# Altium PCB Medusa_9x8.PcbDoc
Units mil, origin at the board's own origin, x right, y up, seen from the top; angles counter-clockwise.
Board outline 3550 x 3000 mil, 4 copper layers (Top Layer, Layer 1, Layer 2, Bottom Layer), stack 23.756 mil thick; 74 components, 67 nets, 329 pads, 111 vias.
Unrouted connection lines stored in the file: 3.
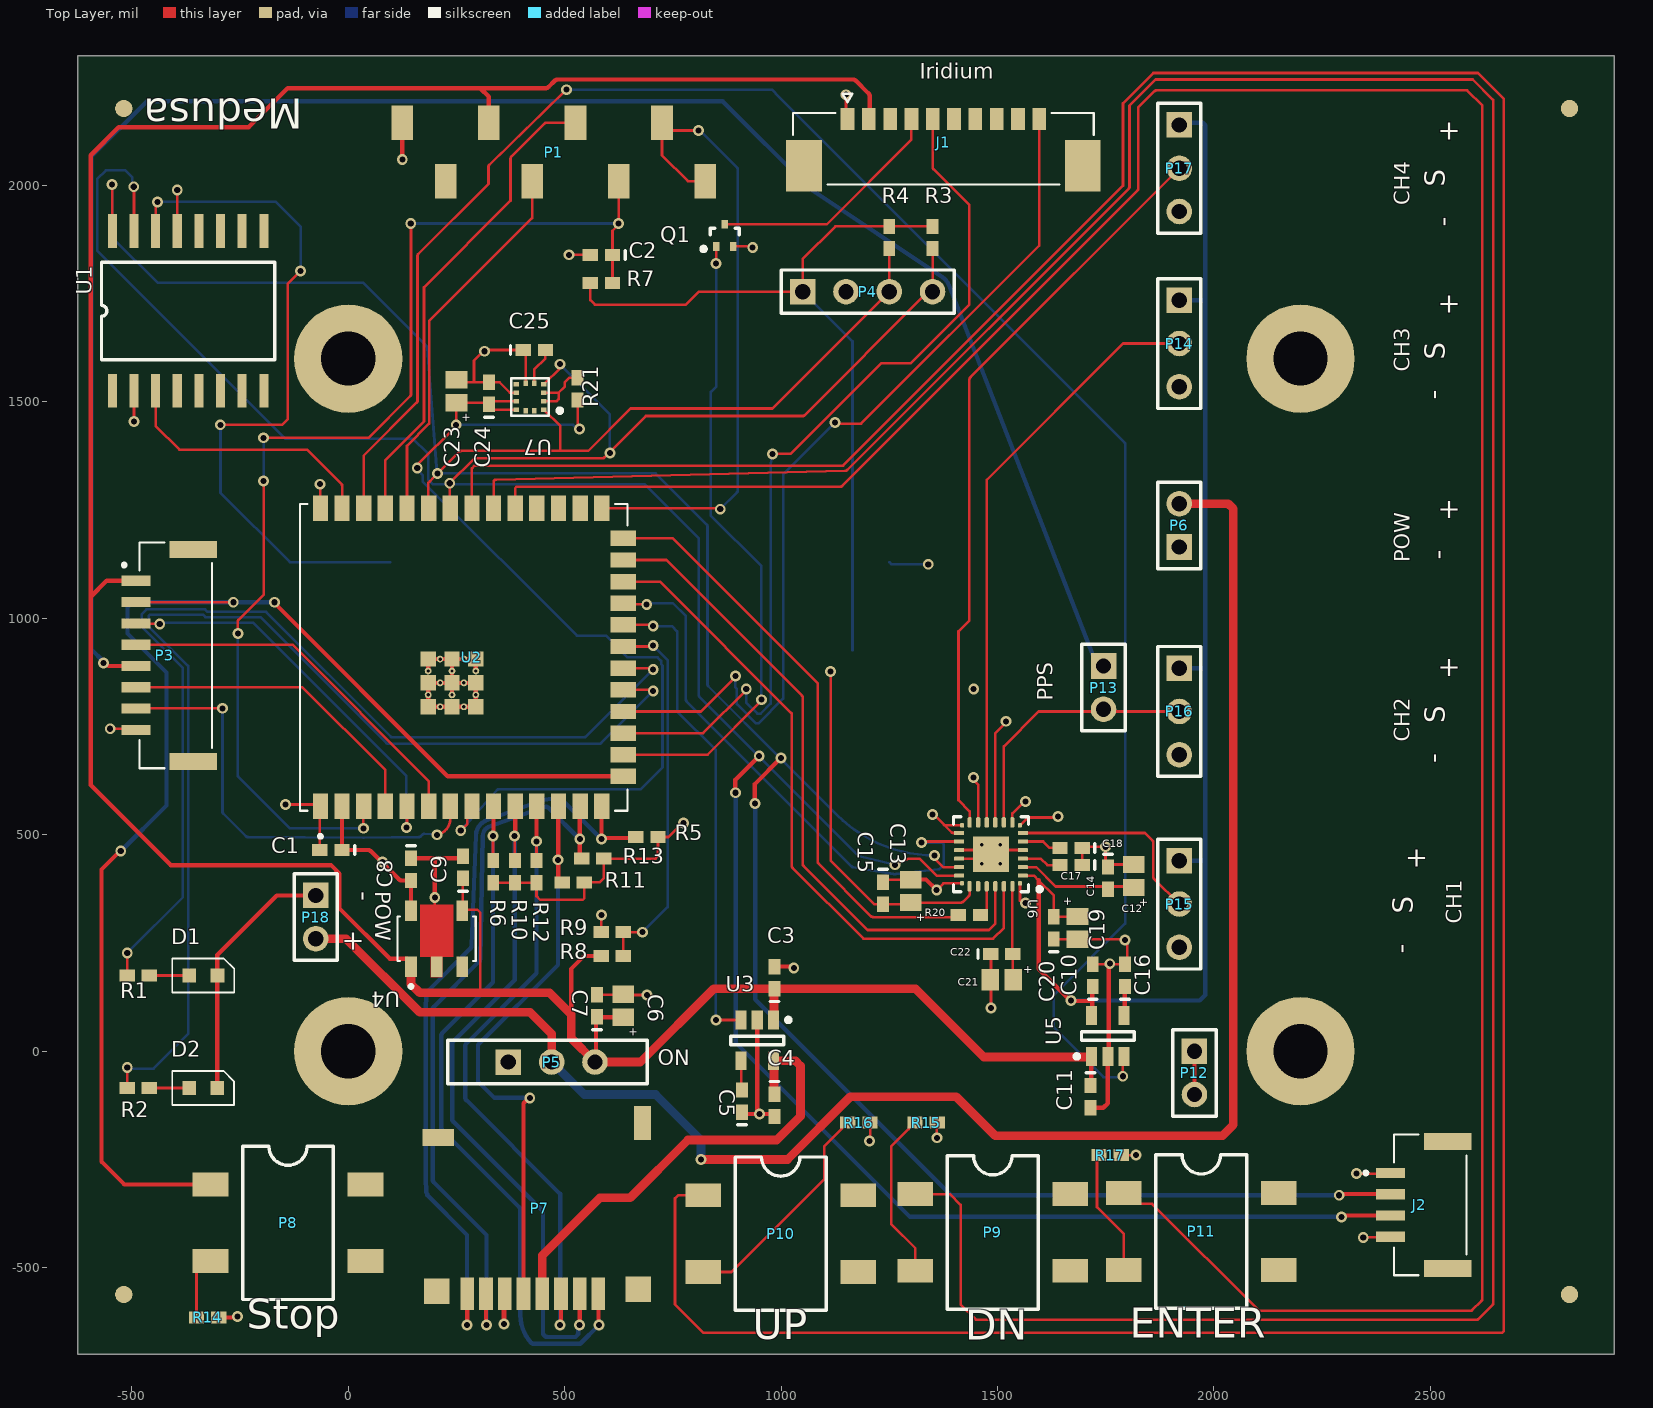
[diagram p0: Top Layer view]
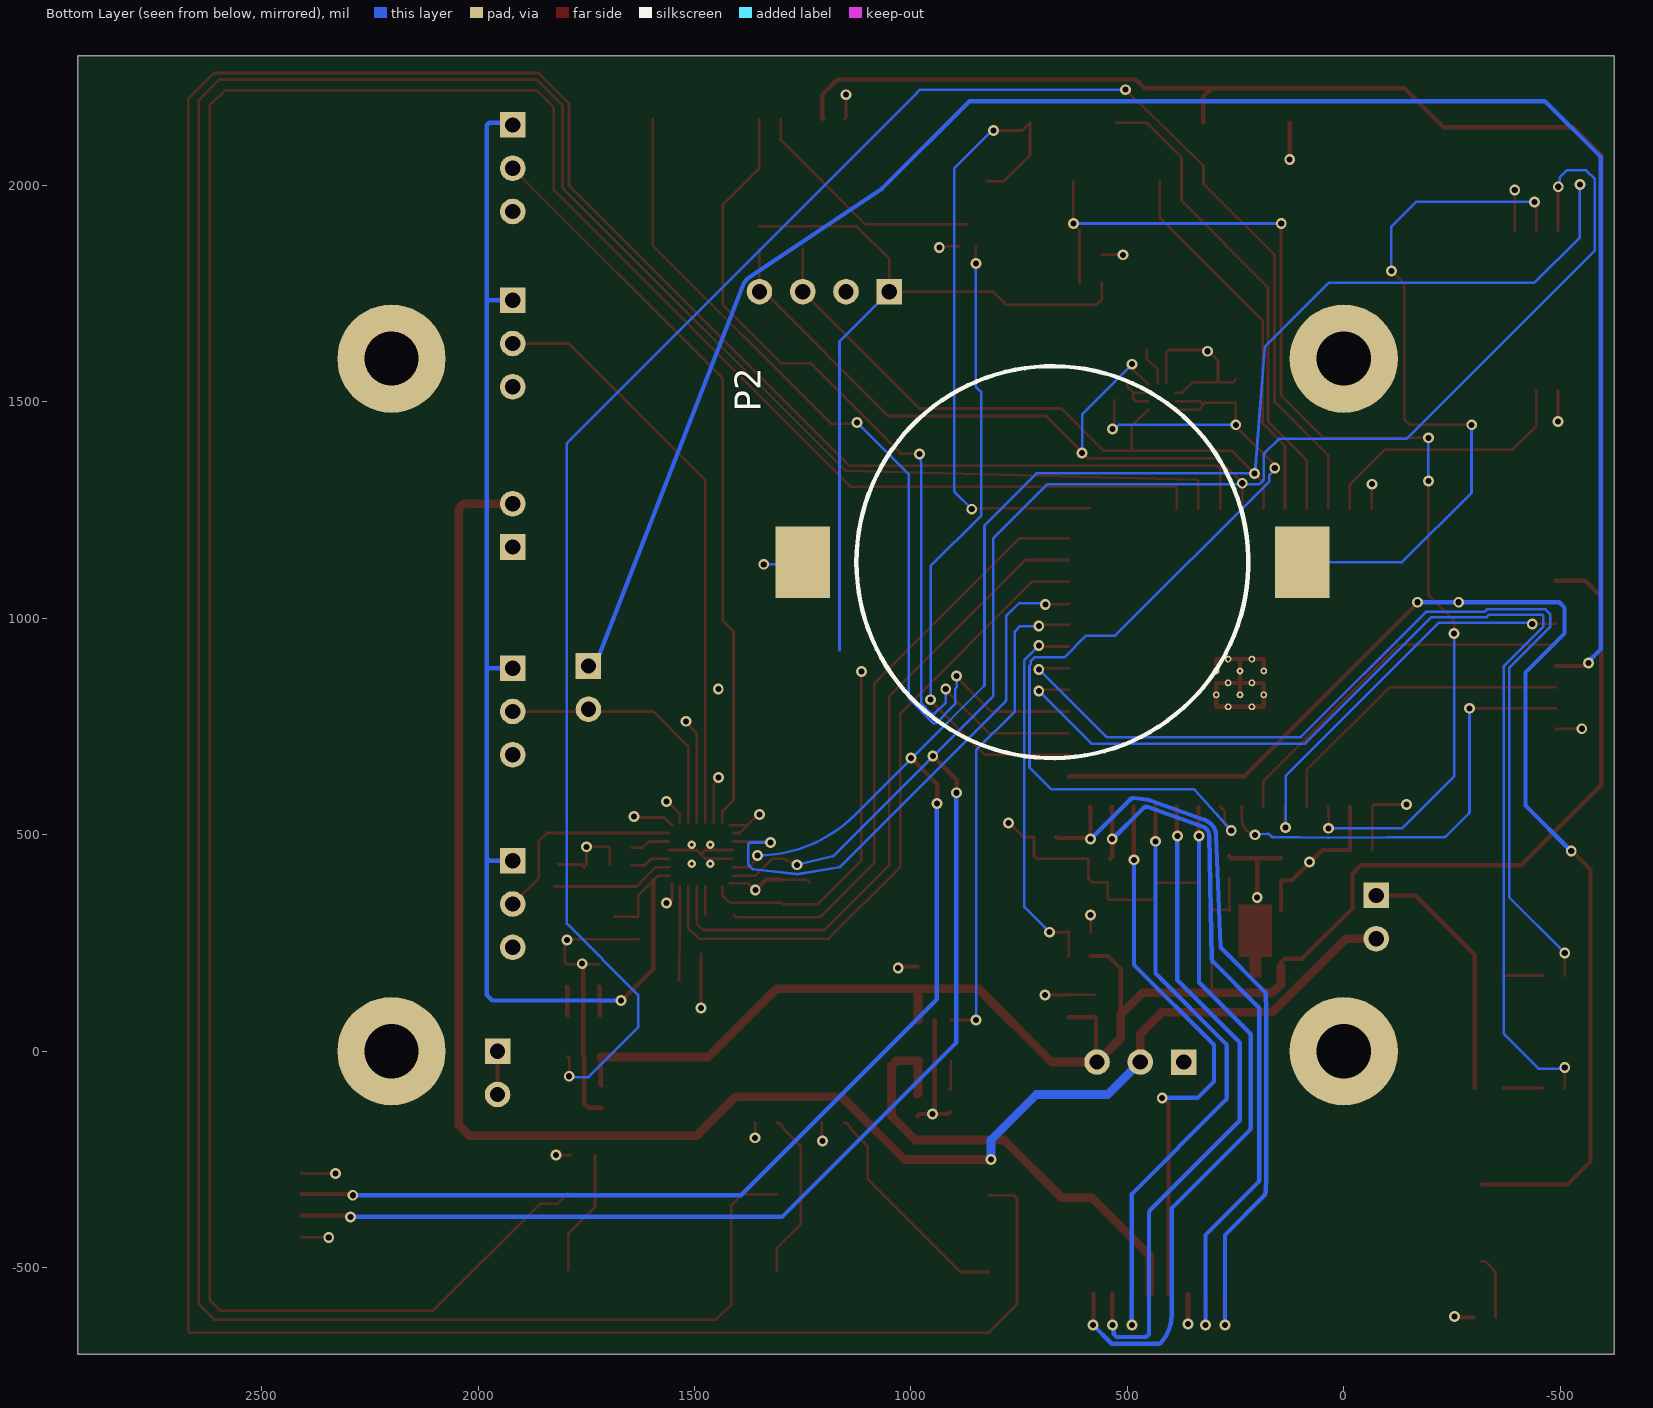
[diagram p1: Bottom Layer view, seen from below]
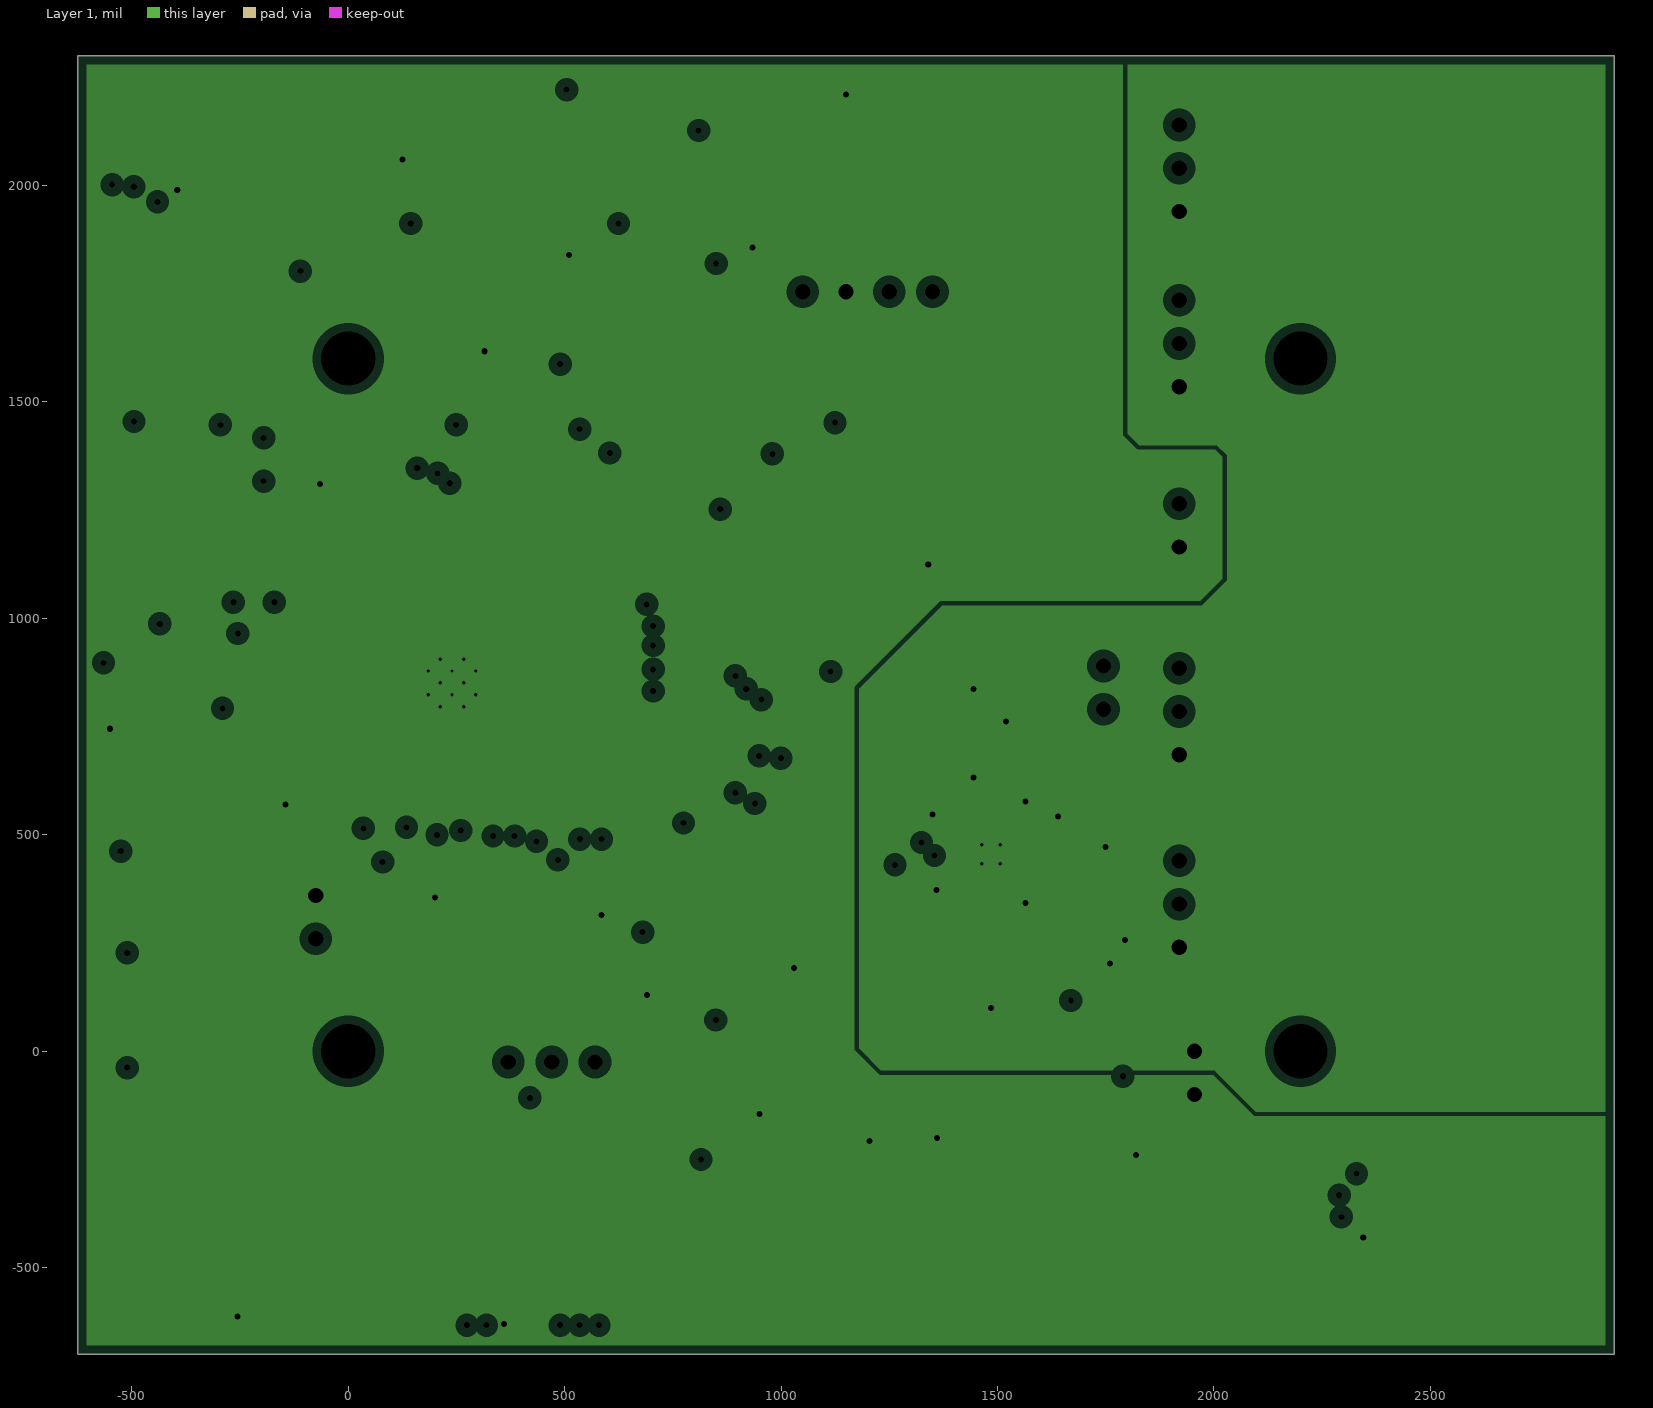
[diagram p2: Layer 1, clearances drawn from the general rule]
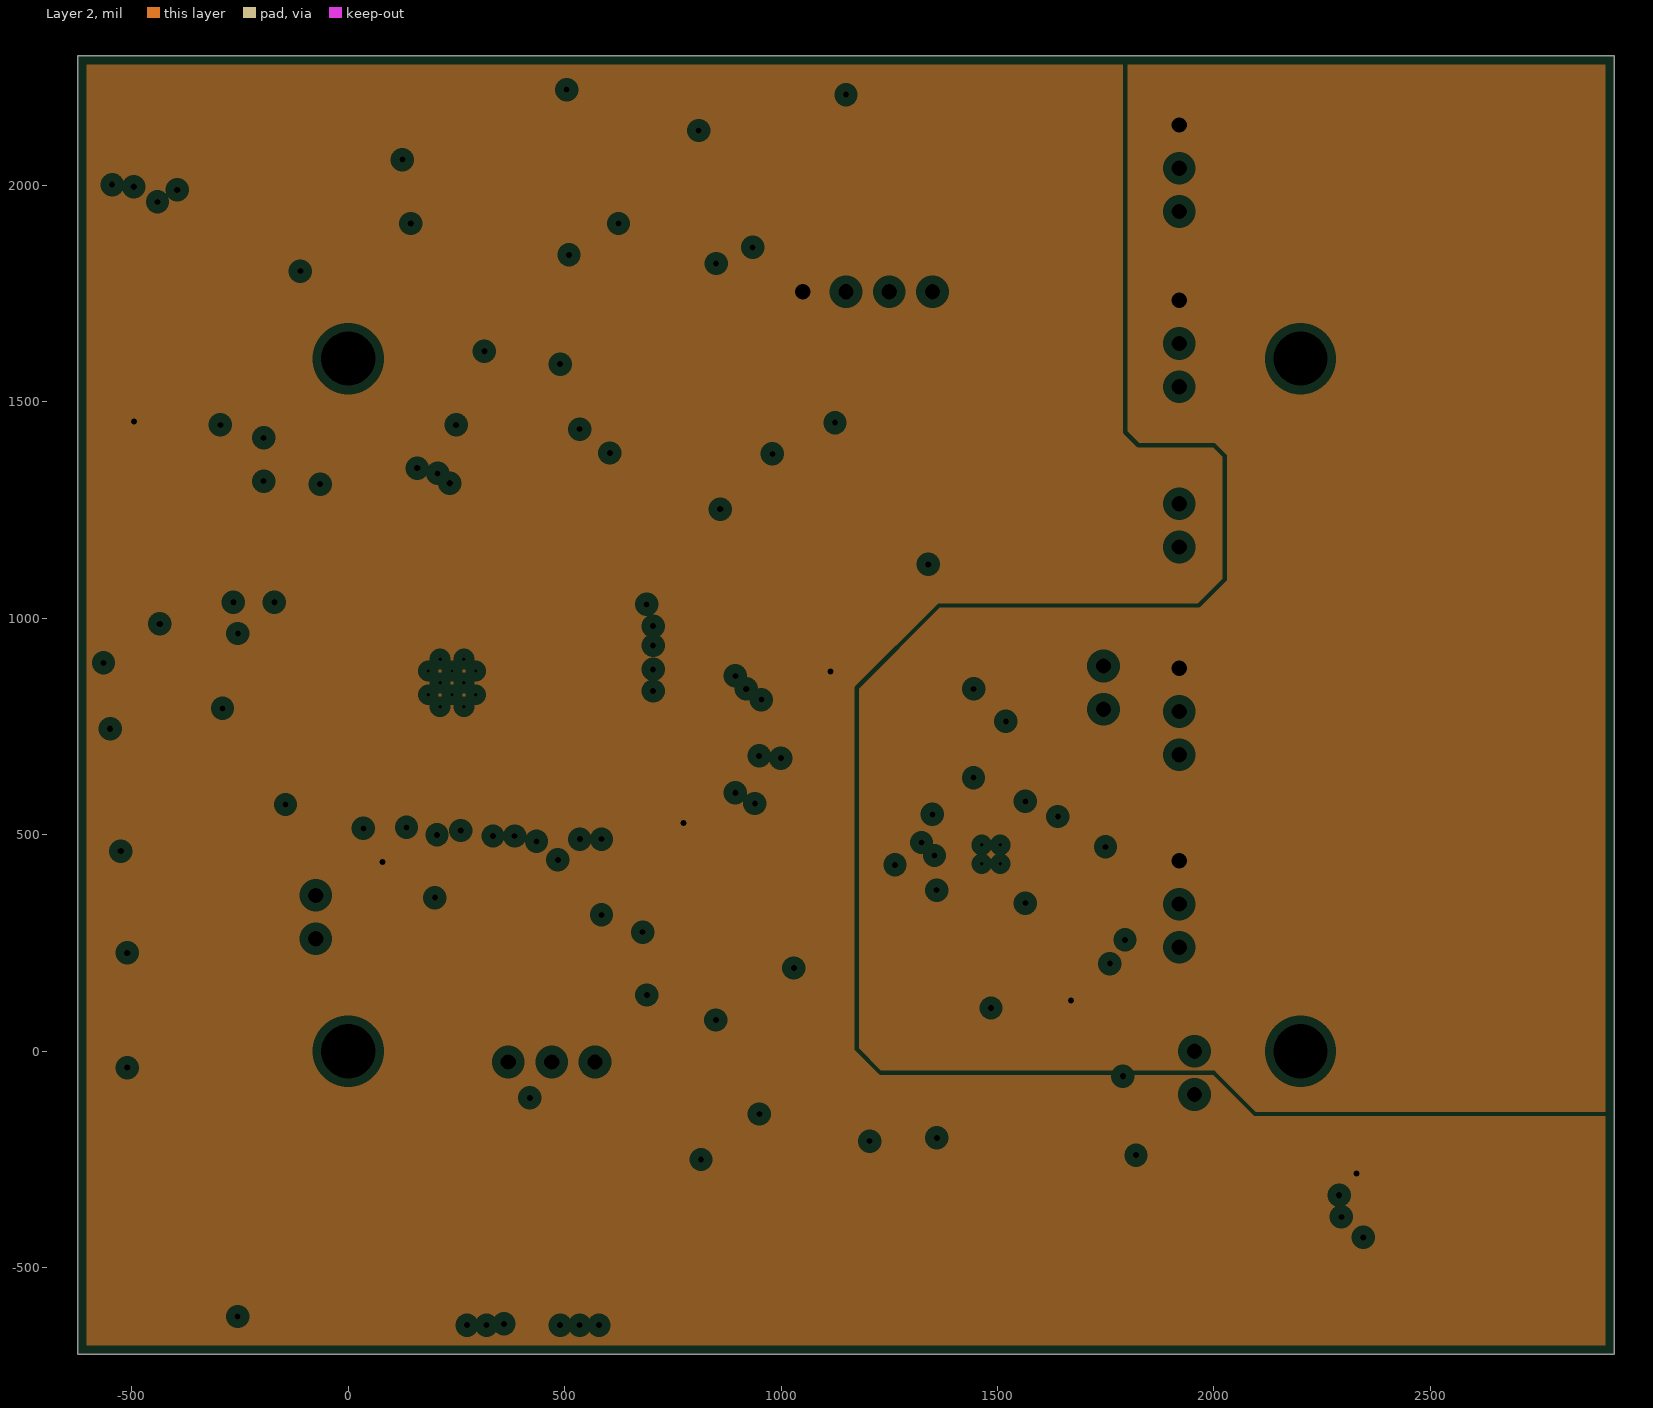
[diagram p3: Layer 2, clearances drawn from the general rule]

## Layer stack, top to bottom
Top Solder: solder mask 0.4, Solder Resist, Dk 3.5
Top Layer: signal copper 1.4
Dielectric 2: prepreg 2.8, PP-006, Dk 4.1
Layer 1: plane copper 1.378, net (Multiple Nets)
Dielectric 1: dielectric 12.6, FR-4, Dk 4.8
Layer 2: plane copper 1.378, net (Multiple Nets)
Dielectric 3: prepreg 2.8, PP-006, Dk 4.1
Bottom Layer: signal copper 1.4
Bottom Solder: solder mask 0.4, Solder Resist, Dk 3.5

## Board outline
-625,-700 2925,-700 2925,2300 -625,2300

## Design rules (kind name [scope] priority, off if disabled: settings)
Clearance [All] p1: gap=6 ignorepadtopadclearanceinfootprint=FALSE
PlaneClearance [All] p1: clearance=20
PlaneConnect [All] p1: planeconnectstyle=Relief reliefexpansion=20 reliefentries=4 reliefconductorwidth=10 reliefairgap=10
PolygonConnect [All] p1: connectstyle=Relief reliefconductorwidth=10 reliefentries=4 polygonreliefangle="90 Angle" airgapwidth=10
RoutingVias [All] p1: holewidth=28 width=50 viastyle="Through Hole" minholewidth=28 minwidth=50 maxholewidth=28 maxwidth=50
SolderMaskExpansion [All] p1: expansion=4 istentingtop=FALSE
Width [All] p1: maxlimit=20 minlimit=6 preferedwidth=10
28 further rules are at their usual default settings.

## Classes and differential pairs
component class Medusa_9x8: C1 C2 C3 C4 C5 C6 C7 C8 C9 D1 D2 J1 P1 P2 P3 P4 P5 P6 P7 P8 P9 P10 P11 P18 Q1 R1 R2 R3 R4 R5 R6 R7 R8 R9 R10 R11 R12 R13 R14 R15 R16 R17 U1 U2 U3 U4
component class Medusa_9x8_audio: C10 C11 C12 C13 C14 C15 C16 C17 C18 C19 C20 C21 C22 C23 C24 C25 J2 P12 P13 P14 P15 P16 P17 R20 R21 U5 U6 U7

## Components (designator, comment, footprint, x,y, rotation, side; value= is the part's Value field where it differs from the comment)
C1 "0.1uF" 0402 -40,465 r180 top
C2 "1uF" 0402 585,1840 r180 top value=0.1uF
C3 "1.0uF" 0402 985,170 r90 top value=0.1uF
C4 "2.2uF" 0402 985,-125 r270 top value=0.1uF
C5 "10nF" 0402 910,-115 r90 top value=0.1uF
C6 "10uF" Tant0805 635,105 r270 top
C7 "0.1uF" 0402 575,105 r90 top
C8 "4.7uF" 0402 145,420 r270 top value=0.1uF
C9 "4.7uF" 0402 265,425 r90 top value=0.1uF
C10 "2.2uF" 0402 1720,175.16 r90 top value=0.1uF
C11 "1uF" 0402 1715,-104.84 r270 top value=0.1uF
C12 "10uF" Tant0805 1815,405 r270 top
C13 "10uF" Tant0805 1300,370 r270 top
C14 "0.1uF" 0402 1755,400 r270 top
C15 "0.1uF" 0402 1235,365 r270 top
C16 "10nF" 0402 1795,175.16 r90 top value=0.1uF
C17 "1.0uF" 0402 1670,430 r180 top value=0.1uF
C18 "1.0uF" 0402 1670,470 r180 top value=0.1uF
C19 "1uF" Tant0805 1685,285 r90 top value=10uF
C20 "0.1uF" 0402 1630,285 r90 top
C21 "10uF" Tant0805 1510,165 r0 top
C22 "0.1uF" 0402 1510,225 r0 top
C23 "10uF" Tant0805 250,1525 r270 top
C24 "0.1uF" 0402 325,1520 r90 top
C25 "220nF" 0402 430,1620 r0 top value=0.1uF
D1 "LED_0603_GREEN" Diode0603 -334.5,175 r0 top
D2 "LED_0603_RED" Diode0603 -335,-85 r0 top
J1 "533981071" MOLEX_533981071 1375,2085 r180 top
J2 "BM04B-GHS-TBT(LF)(SN)(N)" JST_BM04B-GHS-TBT(LF)(SN)(N) 2540,-355 r90 top
P1 "10129380-908001BLF" Header_8_SMT 125,2145 r0 top
P2 "CoinCellHolder" CoinCellHolder 96.46,1130 r0 bottom
P3 "BM08B-GHS-TBT(LF)(SN)(N)" JST_BM08B-GHS-TBT(LF)(SN)(N) -490,914.61 r90 top
P4 "Display" HDR1X4 1050,1755 r0 top
P5 "switch" HDR1X3 370,-25 r0 top
P6 "Header 2" HDR1X2 1920,1165 r90 top
P7 "microSD Hirose" "DM3D microSD" 515,-435 r90 top
P8 "factory reset" SOP4 -318.27,-307.83 r0 top
P9 "factory reset" SOP4 1310,-330 r0 top
P10 "factory reset" SOP4 820,-332.83 r0 top
P11 "factory reset" SOP4 1791.73,-327.83 r0 top
P12 "GND Tie" HDR1X2 1955,0 r270 top
P13 "Jumper PPS to Audio R" HDR1X2 1745,890 r270 top
P14 "HYDROPHONE" HDR1X3 1920,1735 r270 top
P15 "HYDROPHONE" HDR1X3 1920,440 r270 top
P16 "HYDROPHONE" HDR1X3 1920,885 r270 top
P17 "HYDROPHONE" HDR1X3 1920,2140 r270 top
P18 "Header 2" HDR1X2 -75,360 r270 top
Q1 "DMN5L06TK-7" SOT-523 870,1885 r90 top
R1 "330Ohm" 2-0402 -485,175 r180 top
R2 "330Ohm" 2-0402 -485,-85 r180 top
R3 "4.7k" 2-0402 1350,1880 r270 top
R4 "4.7k" 2-0402 1250,1880 r270 top
R5 "10K" 2-0402 690,495 r0 top
R6 "10K" 2-0402 335,415 r270 top
R7 "10K" 2-0402 585,1775 r0 top
R8 "100k" 2-0402 610,220 r180 top
R9 "100k" 2-0402 610,275 r0 top
R10 "10K" 2-0402 385,415 r270 top
R11 "10K" 2-0402 520,390 r0 top
R12 "10K" 2-0402 435,415 r270 top
R13 "10K" 2-0402 565,445 r0 top
R14 "10k" 2-0402 -325,-615 r0 top
R15 "10k" 2-0402 1335,-165 r0 top
R16 "10k" 2-0402 1180,-165 r0 top
R17 "10k" 2-0402 1760,-240 r0 top
R20 "51Ohm" 2-0402 1435,315 r0 top
R21 "10k" 2-0402 530,1530 r270 top
U1 "DS3231" DS3231 -545,1526.1 r90 top
U2 "ESP32-S3-WROOM-1U-N16R8" XCVR_ESP32-S3-WROOM-1U-N16R8 266.89,910 r90 top
U3 "ADP1712" MF05A_N 945,25 r270 top
U4 "3.3V LDO" AP7361C-33Y5-13 145,195.08 r90 top
U5 "ADP1712" MF05A_N 1755,35.16 r90 top
U6 "PCM3140-Q1" PCM3140 1485,455 r180 top
U7 "Accel/Mag" LGA-12 451.34,1481.97 r180 top

## Footprints (in the part's own frame and the unit in brackets; to place one, negate y for a bottom-side part, rotate by r counter-clockwise, add the part's x,y. Pads: shape width x height; smd on the part's side, far side on the other; paste and mask are expansions set on the pad)
2-0402 [mm] "Chip Resistor; Body 1 x 0.5 mm (LxW typ)"
  rect 0.9x0.7 smd: 1(-0.65,0) 2(0.65,0)
0402 [mm] "Chip Capacitor; Body 1.0 x 0.5 mm (LxW typ)"
  rect 0.9x0.7 smd: 1(-0.65,0) 2(0.65,0)
  silkscreen extent -1.4,-0.25 -1.4,0.25
AP7361C-33Y5-13 [mm] "3.3V LDO"
  rect 1.2x0.68 smd: 1(0,0) 3(0,-3) 4(3.3,-3) 5(3.3,0)
  rect 1.2x0.68 smd paste-2 mask+0: 2(0,-1.5)
  Top Layer region: 3.65,-2.465 0.6,-2.465 0.6,-1.84 -0.6,-1.84 -0.6,-1.16 0.6,-1.16 0.6,-0.535 3.65,-0.535
  silkscreen extent -1.25,-3.8 2.95,0.8
CoinCellHolder [mm] "MPD BU2032SM-BT-GTR"
  rect 3.2x4.2 smd: 1(0,0) 2(29.3,0)
  silkscreen extent 3.15,-11.5 26.15,11.5
Diode0603 [mm]
  rect 0.8x0.8 smd: A(-0.825,0) K(0.825,0)
  silkscreen extent -1.83,-1 1.8,1
"DM3D microSD" [mm] "MICROSD_HIROSE Push-Pull"
  rect 1.5x1.5 smd: 0(-3.048,7.874) 0(-2.921,-3.937)
  rect 1x1.85 smd: 0(6,7.8)
  rect 2x1 smd: 0(6.85,-4.191)
  rect 1.9x0.8 smd: 1(-3.188,-1.601) 2(-3.188,-0.501) 3(-3.188,0.599) 4(-3.188,1.699) 5(-3.188,2.799) 6(-3.188,3.899) 7(-3.188,4.999) 8(-3.188,6.099)
  body extent -3.65,-4.45 7.8,7.5, height 1.55
DS3231 [mm]
  rect 1.98x0.53 smd: 1(0,0) 2(0,-1.27) 3(0,-2.54) 4(0,-3.81) 5(0,-5.08) 6(0,-6.35) 7(0,-7.62) 8(0,-8.89) 9(9.37,-8.89) 10(9.37,-7.62) 11(9.37,-6.35) 12(9.37,-5.08) 13(9.37,-3.81) 14(9.37,-2.54) 15(9.37,-1.27) 16(9.37,0)
  silkscreen extent 1.83,-9.53 7.54,0.64
HDR1X2 [mm] "Connector; Header; 2 Position"
  rect 1.5x1.5 hole 0.9: 1(0,0)
  round 1.5 hole 0.9: 2(2.54,0)
  silkscreen extent -1.27,-1.27 3.81,1.27
HDR1X3 [mm] "Connector; Header; 3 Position"
  rect 1.5x1.5 hole 0.9: 1(0,0)
  round 1.5 hole 0.9: 2(2.54,0) 3(5.08,0)
  silkscreen extent -3.56,-1.27 8.14,1.27
HDR1X4 [mm] "Connector; Header; 4 Position"
  rect 1.5x1.5 hole 0.9: 1(0,0)
  round 1.5 hole 0.9: 2(2.54,0) 3(5.08,0) 4(7.62,0)
  silkscreen extent -1.27,-1.27 8.89,1.27
Header_8_SMT [mil] "Amphenol  10129380-908001BLF"
  rect 50x80 smd: 1(0,0) 2(100,-135) 3(200,0) 4(300,-135) 5(400,0) 6(500,-135) 7(600,0) 8(700,-135)
JST_BM04B-GHS-TBT(LF)(SN)(N) [mm]
  rect 0.6x1.7 smd: 1(1.875,3.35) 2(0.625,3.35) 3(-0.625,3.35) 4(-1.875,3.35)
  rect 1x2.8 smd: S1(-3.725,0) S2(3.725,0)
  silkscreen extent -4.13,-1.1 4.13,4.9
JST_BM08B-GHS-TBT(LF)(SN)(N) [mm]
  rect 0.6x1.7 smd: 1(4.375,0) 2(3.125,0) 3(1.875,0) 4(0.625,0) 5(-0.625,0) 6(-1.875,0) 7(-3.125,0) 8(-4.375,0)
  rect 1x2.8 smd: P1(-6.225,-3.35) P2(6.225,-3.35)
  silkscreen extent -6.63,-4.45 6.63,0.8
LGA-12 [mm] "LIS2DS12"
  rect 0.325x0.275 smd paste-0.02 mask+0.01: 1(0,0) 2(0,-0.5) 3(0,-1) 4(0,-1.5) 7(1.6,-1.5) 8(1.6,-1) 9(1.6,-0.5) 10(1.6,0)
  rect 0.275x0.325 smd paste-0.02 mask+0.01: 5(0.55,-1.55) 6(1.05,-1.55) 11(1.05,0.05) 12(0.55,0.05)
  silkscreen extent -1.05,-1.85 1.9,0.35
MF05A_N [mm] "SOT23, 5-Leads, Body 2.9x1.6mm, Pitch 0.95mm, Lead Span 2.8mm, IPC Medium Density"
  rect 1.1x0.65 smd: 1(-1.2,0.95) 2(-1.2,0) 3(-1.2,-0.95) 4(1.2,-0.95) 5(1.2,0.95)
  silkscreen extent -1.32,-1.55 0.25,1.95, body extent -0.9,-1.55 0.9,1.55, height 1.19
MOLEX_533981071 [mm]
  rect 0.8x1.3 smd mask+0.076: 1(5.625,-1.75) 2(4.375,-1.75) 3(3.125,-1.75) 4(1.875,-1.75) 5(0.625,-1.75) 6(-0.625,-1.75) 7(-1.875,-1.75) 8(-3.125,-1.75) 9(-4.375,-1.75) 10(-5.625,-1.75)
  rect 2.1x3 smd mask+0.076: S1(-8.175,1) S2(8.175,1)
  silkscreen extent -8.82,-3.23 8.82,2.1
PCM3140 [mm] "QFN, 24-Leads, Body 4.00x4.00mm, Pitch 0.50mm, Thermal Pad 2.10x2.10mm, IPC Medium Density"
  rrect50% 0.6x0.24 smd mask+0.07: 1(-1.875,1.25) 2(-1.875,0.75) 3(-1.875,0.25) 4(-1.875,-0.25) 5(-1.875,-0.75) 6(-1.875,-1.25) 13(1.875,-1.25) 14(1.875,-0.75) 15(1.875,-0.25) 16(1.875,0.25) 17(1.875,0.75) 18(1.875,1.25)
  rrect50% 0.24x0.6 smd mask+0.07: 7(-1.25,-1.875) 8(-0.75,-1.875) 9(-0.25,-1.875) 10(0.25,-1.875) 11(0.75,-1.875) 12(1.25,-1.875) 19(1.25,1.875) 20(0.75,1.875) 21(0.25,1.875) 22(-0.25,1.875) 23(-0.75,1.875) 24(-1.25,1.875)
  rect 2.1x2.1 smd paste-0.15: 25(0,0)
  rrect50% 0.25x0.25 smd mask+0.07: A1(-1.7,1.7) A2(-1.7,-1.7) A3(1.7,-1.7) A4(1.7,1.7)
  silkscreen extent -2.98,-2.2 2.2,2.2, body extent -2.05,-2.05 2.05,2.05, height 1
SOP4 [mm]
  rect 2.1x1.4 smd: 1(0,0) 2(0,-4.5) 3(9.1,-4.5) 4(9.1,0)
  silkscreen extent 1.89,-6.75 7.21,2.25
SOT-523 [mm] "For Diodes Inc MOSFET DMN5L06TK"
  rect 0.51x0.4 smd: 1(-0.65,0.5) 2(-0.65,-0.5) 3(0.65,0)
  silkscreen extent -0.92,-0.85 0.42,1.37, body extent -0.43,-0.85 0.42,0.85, height 0.8
Tant0805 [mil]
  rect 40x50 smd: 1(-26.5,0) 2(26.5,0)
XCVR_ESP32-S3-WROOM-1U-N16R8 [mm]
  rect 1.5x0.9 smd: 1(-8.75,8.41) 2(-8.75,7.14) 3(-8.75,5.87) 4(-8.75,4.6) 5(-8.75,3.33) 6(-8.75,2.06) 7(-8.75,0.79) 8(-8.75,-0.48) 9(-8.75,-1.75) 10(-8.75,-3.02) 11(-8.75,-4.29) 12(-8.75,-5.56) 13(-8.75,-6.83) 14(-8.75,-8.1) 27(8.75,-8.1) 28(8.75,-6.83) 29(8.75,-5.56) 30(8.75,-4.29) 31(8.75,-3.02) 32(8.75,-1.75) 33(8.75,-0.48) 34(8.75,0.79) 35(8.75,2.06) 36(8.75,3.33) 37(8.75,4.6) 38(8.75,5.87) 39(8.75,7.14) 40(8.75,8.41)
  rect 0.9x1.5 smd: 15(-6.985,-9.35) 16(-5.715,-9.35) 17(-4.445,-9.35) 18(-3.175,-9.35) 19(-1.905,-9.35) 20(-0.635,-9.35) 21(0.635,-9.35) 22(1.905,-9.35) 23(3.175,-9.35) 24(4.445,-9.35) 25(5.715,-9.35) 26(6.985,-9.35)
  rect 0.9x0.9 smd: 41_1(-2.9,2.09) 41_2(-1.5,2.09) 41_3(-0.1,2.09) 41_4(-2.9,0.69) 41_5(-1.5,0.69) 41_6(-0.1,0.69) 41_7(-2.9,-0.71) 41_8(-1.5,-0.71) 41_9(-0.1,-0.71)
  round 0.4 hole 0.2 mask+0: 41_10(-2.2,2.09) 41_11(-0.8,2.09) 41_12(-2.9,1.39) 41_13(-1.5,1.39) 41_14(-0.1,1.39) 41_15(-2.2,0.69) 41_16(-0.8,0.69) 41_17(-2.9,-0.01) 41_18(-1.5,-0.01) 41_19(-0.1,-0.01) 41_20(-2.2,-0.71) 41_21(-0.8,-0.71)
  silkscreen extent -10.6,-9.6 9,9.6, body extent -9,-9.6 9,9.6, height 3.35

## Part data
C1 C2 C3 C4 C5 C7 C8 C9 C10 C11 C14 C15 C16 C17 C18 C20 C22 C24 C25: library part C0402, "Ceramic Chip Capacitor - Standard", PackageDocument=Mar-2001, Code_IPC="1005 [0402]", Code_JEITA=0402, ComponentLink1Description="Manufacturer Link", ComponentLink1URL=http://www.kemet.com/, ComponentLink2Description=Datasheet, ComponentLink2URL=http://www.kemet.com/kemet/web/homepage/kechome.nsf/vapubfilesname/F3102TA.pdf/$file/F3102TA.pdf, DatasheetDocument=Mar-2001, LatestRevisionDate=19-Mar-2004, LatestRevisionNote="Silkscreen size reduced.", Note="Footprint corresponds to dimensions for bulk cassette packaging. This case size has tightened tolerances.", PackageReference=0402, Published=17-Jul-2002, Publisher="Altium Limited"
C6 C12 C13 C19 C21 C23: library part Tant0805
D1 D2: library part LED_0603, Supplier Part Number 1=18AC7715, Supplier 1=Newark
J1: Package=None, Availability=Unavailable, MP=533981071, Price=None
J2: "Connector Header Surface Mount 4 position 0.049 _1.25mm_", Package=None, Digi-Key_Part_Number=455-1580-1-ND, Digi-Key_Purchase_URL=https://www.digikey.com/product-detail/en/jst-sales-america-inc/BM04B-GHS-TBT_LF__SN__N_/455-1580-1-ND/807848?utm_source=snapeda&utm_medium=aggregator&utm_campaign=symbol, MF="JST Sales", MP=BM04B-GHS-TBT_LF__SN__N_, SnapEDA_Link=https://www.snapeda.com/parts/BM04B-GHS-TBT%28LF%29%28SN%29%28N%29/JST%20Sales%20America%20Inc./view-part/841999/?ref=snap
P1: library part Header8_SMT, "Surface mount header", Supplier Part Number 1=649-1012938090801BLF, Supplier 1=Mouser
P2: Supplier Part Number 1=BU2032SM-BT-GCT-ND, Supplier 1=Digi-Key
P3: "Connector Header Surface Mount 8 position 0.049 _1.25mm_", Package=None, Availability=Unavailable, MF="JST Sales", MP=BM08B-GHS-TBT_LF__SN__N_, Price=None, SnapEDA_Link=https://www.snapeda.com/parts/BM08B-GHS-TBT%28LF%29%28SN%29%28N%29/JST%20Sales%20America%20Inc./view-part/568692/?ref=snap
P4: library part "Header 4", "Header, 4-Pin", LatestRevisionDate=17-Jul-2002, LatestRevisionNote="Re-released for DXP Platform.", Publisher="Altium Limited"
P5 P14 P15 P16 P17: library part "Header 3", "Header, 3-Pin", LatestRevisionDate=17-Jul-2002, LatestRevisionNote="Re-released for DXP Platform.", Publisher="Altium Limited"
P6 P18: "Header, 2-Pin", LatestRevisionDate=17-Jul-2002, LatestRevisionNote="Re-released for DXP Platform.", Publisher="Altium Limited"
P7: Supplier Part Number 1=HR1941DKR-ND, Supplier 1=Digi-Key
P8 P9 P10 P11: library part pushbutton, Supplier Part Number 1=450-1757-2-ND, Supplier 1=Digi-Key
P12 P13: library part "Header 2", "Header, 2-Pin", LatestRevisionDate=17-Jul-2002, LatestRevisionNote="Re-released for DXP Platform.", Publisher="Altium Limited"
Q1: library part "FET DMN5L06TK-7", "Ultra-low leakage Enhanced MOSFET", Supplier Part Number 1=DMN5L06TKDICT-ND, Creator and Date="Will Flanery 2010-09-02", Fabrication Tested=NO, HelpURL=http://www.diodes.com/datasheets/ds30926.pdf, Supplier 1=Digi-Key
R1 R2 R3 R4 R5 R6 R7 R8 R9 R10 R11 R12 R13 R14 R15 R16 R17 R20 R21: library part ERJ2RB, "Precision Thick Film Chip Resistor, 10 Ohm to 1M Ohm Range, 1% and 0.5% Tolerance, 0402 Size, 0.063 W", PackageDocument=Mar-2003, Code_IPC="1005 [0402]", ComponentLink1Description="Manufacturer Link", ComponentLink1URL=http://www.panasonic.com/industrial/components/resistive_products.htm, ComponentLink2Description=Datasheet, ComponentLink2URL=http://www.panasonic.com/industrial/components/pdf/AOA0000CE2.pdf, LatestRevisionDate=19-Mar-2004, LatestRevisionNote="Silkscreen size reduced.", PackageReference=2-0402, Published=17-Dec-2003, Publisher="Altium Limited"
U1: Supplier Part Number 1=DS3231S#-ND, Supplier 1=Digi-Key
U2: "Bluetooth, WiFi 802.11b/g/n, Bluetooth v5.0 Transceiver Module 2.4GHz Antenna Not Included, U.FL Surface Mount", Package=None, Availability=Unavailable, Check_prices=https://www.snapeda.com/parts/ESP32-S3-WROOM-1U-N16R8/Espressif+Systems/view-part/?ref=eda, MF="Espressif Systems", MP=ESP32-S3-WROOM-1U-N16R8, Price=None, SnapEDA_Link=https://www.snapeda.com/parts/ESP32-S3-WROOM-1U-N16R8/Espressif+Systems/view-part/?ref=snap
U3 U5: library part LP3985IM5-3.3, "Micropower, 150mA Low-Noise Ultra Low-Dropout CMOS Voltage Regulator", DigiKeyPartNumber=LP3985IM5-3.3CT-ND, Manufacturer="National Semiconductor", PackageTopMarking=LDQB*XTT, PowerWise=N, ComponentLink1Description="LP3985 Datasheet", ComponentLink1URL=http://www.national.com/ds/LP/LP3985.pdf, ComponentLink2Description="LP3985 Web Page", ComponentLink2URL=http://www.national.com/pf/LP/LP3985.html, ComponentLink3Description="MF05A Package Page", ComponentLink3URL=http://www.national.com/packaging/folders/mf05a.html, CompType="LDO IC", DatasheetVersion=Aug-2005, PackageDescription="Molded SOT-23, .115 x .063 x .040 in Body, 5 Lead, .0375 in Pitch", PackageReference=MF05A, PackageVersion="revD, Aug-2008", PartNumber=LP3985IM5-3.3, PinCount=5, Published=4-Dec-2008, Publisher="Altium Limited", RoHS=O
U4: library part AP7361C-33Y5-13
U7: library part LSM303AGR, Supplier Part Number 1=511-LSM303AGRTR, Supplier 1=Mouser

## Free pads (board coordinates)
  round 40 smd paste-20 mask+5: 0(-518.58,-562.05) 0(-518.58,2177.95) 0(2821.42,-562.05) 0(2821.42,2177.95)
  round 250 hole 125: 0(0,0) 0(0,1600) 0(2200,0) 0(2200,1600)

## Via types
v1: diameter 25, hole 14, Top Layer to Bottom Layer, tented both sides, 107 vias
v2: diameter 19.68, hole 7.87, Top Layer to Bottom Layer, 4 vias

## Nets (pads, with @x,y where several pads share a name; then routed paths per layer and width w, separated by ;. In a path a pad name is that pad's centre, name@x,y a point inside that pad or via, vN(x,y) a via of type N, cw(c..) or ccw(c..) an arc to the next point about the centre after c; other vN are vias at no path point)
3V3: C1.1 C8.2 C13.2 C15.2 J2.1 P4.1 R3.1 R4.1 R5.2 R6.2 R7.1 R10.2 R11.2 R12.2 R13.2 U1.2 U2.2 U4.5 U6.19 | length 3788.9
  Top Layer w6: v1(-495,1455) U1.2 ; R6.2 R10.2 R12.2 435,358.51 443.51,350 542.08,350 545.59,353.51 R11.2 580,390 590.59,400.59 R13.2 710,445 715.59,450.59 R5.2 740,495 v1@773.37,528.37 ; R7.1 559.41,1735.59 570,1725 780,1725 810,1755 P4.1 1050,1830 1125.59,1905.59 R4.1 R3.1 ; v1@1115,880 1115,440 1215.59,339.41 C15.2 1295.91,339.41 C13.2 1416.01,343.5 ccw(c1416.01,349.5) 1420.24,345.24 1434.06,359.06 ccw(c1429.79,363.27) 1435.79,363.27 U6.19 ; v1(2329.48,-282.74) 2406.55,-282.74 J2.1
  Top Layer w10: U2.2 -14.21,465.2 C1.1 45.27,465 cw(c45.27,455) 52.29,462.12 117.09,397.32 ccw(c124.14,404.41) 124.14,394.41 C8.2 U4.5
  Bottom Layer w6: P4.1 1165,1640 1165,926.29
  other v1: 79.48,437.26 774.48,527.26 1114.48,877.26
4V2: P5.2 P6.2 P18.2 | length 4056.5
  Top Layer w20: P18.2 -5,260 165,90 420,90 470,40 P5.2 ; v1(815,-250) 1015,-250 1160,-105 1405,-105 1495,-195 2020,-195 2045,-170 2045,1253.28 2033.28,1265 P6.2
  Bottom Layer w20: P5.2 545,-100 710,-100 815,-205 v1(815,-250)
AGND: C10.2 C11.2 C12.1 C13.1 C14.1 C15.1 C16.2 C17.1 C18.1 C19.1 C20.1 C21.1 C22.1 P12.1 P14.3 P15.3 P16.3 P17.3 U5.2 U6.4 U6.7 U6.9 U6.11 U6.13 U6.15 U6.16 U6.25 U6.A1 U6.A2 U6.A3 U6.A4 | length 2115
  Top Layer w6: C15.1 1240.91,396.5 C13.1 ; v1@1350,550 1372.03,527.97 ; v1(1359.48,372.26) 1375.29,388.07 U6.A4 ; U6.16 1475.16,445.16 U6.25 ; U6.15 1475.16,464.84 U6.25 ; U6.13 1398.24,504.21 cw(c1398.27,510.21) 1394.06,505.94 1372.03,527.97 ; U6.A3 1378.07,521.93 1372.03,527.97 ; v1(1444.48,632.26) 1444.48,627.12 1455.47,616.13 U6.11 ; C22.1 1485,224.41 v1(1485,100) ; U6.9 1494.84,734.84 v1@1520,760 ; U6.7 1534.21,549.21 v1@1560,575 ; U6.A1 1551.93,348.07 v1@1560,340 ; U6.A2 1570,540 v1@1635,540 ; U6.4 1494.84,464.84 U6.25 ; C20.1 1630.91,258.5 C19.1 v1@1798.5,258.5 ; C17.1 C18.1 1697.85,472.26 v1(1749.48,472.26) 1749.48,431.11 C14.1 1760.91,431.5 C12.1 ; C10.2 1757.97,200.75 C16.2 1799.48,205.23 v1@1799.48,257.26
  Top Layer w10: C13.1 1300.25,396.75 1335,396.75 v1(1359.48,372.26) ; C11.2 1744.57,-130.43 1755,-120 U5.2 1757.24,-9.85 1757.24,200.02 1757.97,200.75 v1(1759.48,202.26)
  other v1: 1794.48,257.26 1564.48,342.26 1639.48,542.26 1349.48,547.26 1564.48,577.26 1519.48,762.26 1444.98,837.26
  other v2: 1463.35,433.35 1506.65,433.35 1463.35,476.65 1506.65,476.65
AVDD: C10.1 C19.2 C20.2 P14.1 P15.1 P16.1 P17.1 U5.5 U6.1 | length 3193.5
  Top Layer w6: U6.1 1584.21,405.79 1595,395 1630,360 C20.2 1684.09,310.59 C19.2
  Top Layer w10: 1595,395 1595,194.14 ccw(c1605,194.14) 1597.91,187.09 1666.11,118.89 ccw(c1673.16,125.98) 1673.16,115.98 1718.8,115.98 ; U5.5 1718.8,83.6 1718.8,115.98 ; C10.1 1718.8,148.37 1718.8,115.98
  Bottom Layer w10: v1(1669.48,117.26) 1967.26,117.26 1980,130 1980,445.86 ; P15.1 1974.14,440 1980,445.86 ; P16.1 1980,885 ; P14.1 1980,1735 ; P17.1 1925,2145 1974.14,2145 1980,2139.14 1980,1735 ; 1980,445.86 1980,885 ; 1980,885 1980,1735
BATT_BACK: P2.1 U1.14 | length 1647.2
  Top Layer w6: U1.14 v1@-445,1965 ; v1(-295.52,1447.26) -152.74,1447.26 -140,1460 -140,1772.78 v1(-110.52,1802.26)
  Bottom Layer w6: v1(-440.52,1962.26) -167.26,1962.26 -110,1905 v1@-110,1805 ; v1@-295,1440 -295,1290 -135,1130 P2.1
BCLK: U2.25 U6.22 | length 1534.4
  Top Layer w6: U2.25 735,1135 1048.24,821.76 cw(c1044,817.51) 1050,817.51 1050,432.49 ccw(c1056,432.49) 1051.74,428.26 1200,280 1480,280 1494.84,294.84 U6.22
BRIGHT: P3.6 U2.4 | length 738.8
  Top Layer w6: P3.6 -105.79,840.79 85.79,649.21 U2.4
BUTTON: P3.2 P8.1 U2.15 | length 3199.6
  Top Layer w6: P3.2 -489.63,1037.26 v1(-265.52,1037.26)
  Top Layer w10: v1@-525,465 -570,420 -570,-255 -517.17,-307.83 P8.1 ; v1@-172.64,1037.64 230,635 U2.15
  Bottom Layer w10: v1(-525.52,462.26) -420,567.78 -420,875 -510,965 -510,1025 -497.74,1037.26 v1(-265.52,1037.26) v1(-170.52,1037.26)
CHIP_PU: C2.1 P1.6 R7.2 U2.3 | length 2694
  Top Layer w6: v1(-255,965) -255.47,991.92 cw(c-249.47,992.04) -253.72,996.28 -195,1055 v1@-195,1315 ; v1(-195.52,1417.26) 47.26,1417.26 143.24,1513.24 ccw(c139,1517.49) 145,1517.49 v1@145,1915.3 ; v1(35,515) 35,538.98 U2.3 ; R7.2 610.59,1895.59 625,1910 P1.6
  Bottom Layer w6: v1(-255,965) -255,637.49 ccw(c-249,637.49) -253.25,633.25 -135,515 v1(35,515) ; v1(-195.52,1317.26) v1@-195.52,1414.48 ; v1(144.48,1912.26) v1(624.48,1912.26)
CS/DAT3: P7.2 R10.1 U2.10 | length 1595.5
  Top Layer w6: v1(384.48,497.26) 384.48,441.11 R10.1
  Top Layer w10: v1@385.79,500.79 U2.10 ; v1@534.72,-629.72 P7.2
  Bottom Layer w10: v1(384.48,497.26) 384.48,164.48 242.93,22.93 ccw(c250,15.86) 240,15.86 240,-155.86 ccw(c250,-155.86) 242.93,-162.93 447.07,-367.07 cw(c440,-374.14) 450,-374.14 450,-650.04 ccw(c460,-650) 459.96,-660 525,-660 531.61,-653.39 531.61,-635.61 v1(534.48,-632.74)
DAT1: P7.8 R5.1 U2.14 | length 1797.1
  Top Layer w10: v1@274.88,-629.88 P7.8 ; U2.14 585.01,541.14 ccw(c595,540.87) 585,540.87 v1(585,490) 587.5,492.5 661.91,492.5 R5.1
  Bottom Layer w10: 182.93,-332.93 274.48,-424.48 v1(274.48,-632.74) ; 182.93,-332.92 182.92,-332.84 ccw(c172.95,-333.56) 182.28,-329.96 180.62,-325.66 cw(c189.89,-321.91) 179.9,-322.3 179.02,-296.76 cw(c205,-295.86) 179,-295.86 179,95.86 cw(c205,95.86) 179.01,96.61 180.01,131.18 cw(c190,130.86) 182.93,137.93 282.07,237.07 ; 282.1,237.1 ccw(c274.96,244.1) 284.95,243.71 295.01,498.82 cw(c334.48,497.26) 321.18,534.46 447.1,579.48 cw(c455.86,555) 452.56,580.79 484.62,584.89 cw(c485.89,574.97) 492.89,582.11 492.93,582.07 v1(585,490)
DAT2: P7.1 R6.1 U2.9 | length 1670.4
  Top Layer w6: v1(334.48,497.26) 334.48,441.11 R6.1
  Top Layer w10: v1@335.79,495.79 U2.9 ; v1@578.03,-628.03 P7.1
  Bottom Layer w10: v1(334.48,497.26) 334.48,159.48 217.93,42.93 ccw(c225,35.86) 215,35.86 215,-175.86 ccw(c225,-175.86) 217.93,-182.93 394.82,-359.82 cw(c387.74,-366.89) 397.74,-366.89 397.74,-610.01 ccw(c492.54,-609.4) 422,-672.73 ccw(c429.4,-666) 429.32,-676 536.22,-676 v1(579.48,-632.74)
DGND: C1.2 C2.2 C3.2 C4.2 C5.1 C6.1 C7.2 C8.1 C9.2 C23.1 C24.2 C25.1 D1.K D2.K J1.1 J2.4 P1.1 P2.2 P3.8 P4.2 P6.1 P7.6 P12.2 P18.1 Q1.2 R9.1 R14.2 R15.2 R16.2 R17.2 U1.13 U2.1 U2.40 U2.41_1 U2.41_2 U2.41_3 U2.41_4 U2.41_5 U2.41_6 U2.41_7 U2.41_8 U2.41_9 U2.41_10 U2.41_11 U2.41_12 U2.41_13 U2.41_14 U2.41_15 U2.41_16 U2.41_17 U2.41_18 U2.41_19 U2.41_20 U2.41_21 U3.2 U4.2 U7.6 U7.8 | length 3382.1
  Top Layer w6: v1(-550,745) -492.64,745 P3.8 ; U1.13 v1(-395,1990) ; v1(-145,570) -68.7,570 -65.59,566.89 C1.2 ; v1(-65,1310) -65,1255.28 U2.40 ; 200,265 v1(200,355) ; C23.1 255.91,1545.59 290.45,1545.59 ; P7.6@360,-562.01 P7.6 ; U7.8 373.66,1521.34 349.41,1545.59 C24.2 290.45,1545.59 ; U7.6 410,1614.41 C25.1 315,1620 290.45,1595.45 290.45,1545.59 ; v1(510,1840) C2.2 ; C7.2 634.09,130.59 C6.1 636.5,130 v1(690,130) ; R9.1 585,285.78 v1(585,315) ; Q1.2 v1@934.41,1859.41 ; v1(1150,2210) 1150,2157.44 J1.1 ; v1@1205,-210 1205.59,-209.41 R16.2 ; v1(1360,-200) 1360,-165.59 R15.2 ; R17.2 v1(1820,-240) ; v1(2345,-430) 2406.93,-430 J2.4
  Top Layer w10: D2.K -302.52,222.48 -165,360 P18.1 ; R14.2 v1@-260,-615 ; v1(125,2060) P1.1 ; C8.1 202.5,445.59 ; U2.41_11 U2.41_3 U2.41_14 U2.41_6 ; v1(200,355) 200,443.09 202.5,445.59 ; U2.41_15 U2.41_5 ; C9.2 260,445.59 202.5,445.59 ; U2.41_21 U2.41_9 U2.41_19 U2.41_6 ; C5.1 914.41,-145 v1(950,-145) ; U3.2 945,-135.94 950,-140.94 v1(950,-145) ; C4.2 979.41,-145 v1(950,-145) ; C3.2 v1@1022.81,195.59 ; U2.41_5 U2.41_18 U2.41_8 U2.41_20 U2.41_7 U2.41_17 U2.41_4 U2.41_12 U2.41_1 U2.41_10 U2.41_2 U2.41_13 U2.41_5 ; U2.41_5 U2.41_16 U2.41_6
  Top Layer w12: v1(360,-630) P7.6@360,-562.01
  Bottom Layer w6: P2.2 1255,1125 v1(1340,1125)
  other v1: -255.52,-612.74 1204.48,-207.74 1029.48,192.26 314.48,1617.26 934.48,1857.26
DOWN: P9.1 U2.32 | length 7264.9
  Top Layer w6: U2.32 335.79,1317.27 337.54,1319.03 cw(c341.79,1314.79) 341.64,1320.79 1148.81,1341.14 ccw(c1148.66,1347.14) 1152.88,1342.88 1803.27,1993.27 ccw(c1799,1997.49) 1805,1997.49 1805,2185 1865,2245 2598,2245 2645,2198 2645,-582.51 cw(c2639,-582.51) 2643.27,-586.73 2611.74,-618.26 cw(c2607.51,-614) 2607.51,-620 1450,-620 1415,-585 1415,-355 1390,-330 P9.1
ENTER: P11.1 U2.31 | length 6497.1
  Top Layer w6: U2.31 385.79,1300.7 389.3,1304.21 1136.73,1304.21 ccw(c1136.73,1310.21) 1140.95,1305.95 1823.27,1988.27 ccw(c1819,1992.49) 1825,1992.49 1825,2180 1863.24,2218.24 cw(c1867.49,2214) 1867.49,2220 2585,2220 2620,2185 2620,-572.51 cw(c2614,-572.51) 2618.27,-576.73 2596.74,-598.26 cw(c2592.51,-594) 2592.51,-600 2105,-600 1857.39,-352.39 1816.29,-352.39 P11.1
GPIO0: P1.7 P1.8 U2.27 | length 1501.7
  Top Layer w6: U2.27 v1@864.49,1254.49 ; v1(809.48,2127.26) 742.74,2127.26 P1.7 725,2070 785,2010 P1.8
  Bottom Layer w6: v1@810,2130 898.24,2041.76 cw(c894,2037.51) 900,2037.51 900,1295.27 cw(c894,1295.27) 898.24,1291.02 v1(859.48,1252.26)
GPS_EN: P3.7 U2.7 | length 1042.7
  Top Layer w6: P3.7 -489.31,792.26 v1(-290.52,792.26) ; v1(205,500) ccw(c197.82,537.28) U2.7@235.79,537.29 ; U2.7@235.79,537.33 U2.7
  Bottom Layer w6: v1(-290.52,792.26) -290.52,553 ccw(c-284.52,553) -288.75,548.75 -236.76,496.76 ccw(c-232.51,501) -232.54,495 34.92,493.5 ccw(c35,515) 35.26,493.5 163.65,495.03 ccw(c163.58,501.03) 167.77,496.73 ; 167.8,496.76 171.36,500.33 cw(c175.61,496.08) 176.04,502.07 v1(205,500)
GREEN: R1.2 U2.20 | length 2369
  Top Layer w6: R1.2 -510.52,175.07 v1(-510.52,227.26) ; U2.20 v1@705,885
  Bottom Layer w6: v1@-510,230 -507.78,230 -382,355.78 -382,885.03 -477,980.03 -477,1009.97 -466.21,1020.76 -330.99,1020.76 -325.22,1015 -190,1015 98.24,726.76 ccw(c102.49,731) 102.49,725 544.73,725 ccw(c544.73,731) 548.98,726.76 v1(704.48,882.26)
HYDRO_EN: U2.38 U5.3 | length 4463.2
  Top Layer w6: U2.38 35.79,1375.79 158.24,1498.24 ccw(c154,1502.49) 160,1502.49 160,1837.51 cw(c166,1837.51) 161.76,1841.76 324.01,2004.01 324.01,2043.5 cw(c330.02,2043.5) 325.83,2047.8 v1(504.48,2221.5) ; v1(1789.48,-57.74) 1789.48,-15.01 U5.3
  Bottom Layer w6: v1(504.48,2221.5) 978.5,2221.5 995,2205 1793.26,1406.74 cw(c1789,1402.51) 1795,1402.51 1795,295 1630,130 1630,55 1745,-60 v1@1790,-60
I2SDOUT: R20.1 U2.26 | length 1381.2
  Top Layer w6: U2.26 750,1185 1083.24,851.76 cw(c1079,847.51) 1085,847.51 1085,437.49 ccw(c1091,437.49) 1086.74,433.26 1208.24,311.76 ccw(c1212.49,316) 1212.49,310 1404.41,310 R20.1
IMU_EN: C23.2 C24.1 R21.2 U2.8 U7.9 U7.10 | length 2360.4
  Top Layer w6: v1@160,1350 160,1355 250,1445 C23.2 320.91,1498.5 C24.1 ; v1(260,510) 275.2,525.2 275.2,554.93 U2.8 ; U7.10 335.78,1481.97 325,1492.75 C24.1 ; U7.9 332.24,1501.65 C24.1 ; R21.2 530,1440 v1@535,1435
  Bottom Layer w6: v1(159.48,1347.26) 159.48,1342.8 172.45,1329.83 172.45,1315.58 528.03,960 595,960 645,910 714.78,910 723,901.78 723,894.15 725.98,891.17 725.98,655.98 675,605 347.68,605 ; v1(249.48,1447.26) 519.34,1447.26 529.34,1437.26 v1(534.48,1437.26) ; v1(260,510) 343.26,603 cw(c347.73,599) 347.63,605
IN1P: P15.2 U6.6 | length 478.5
  Top Layer w6: U6.6 1840.79,504.21 1858.24,486.76 cw(c1854,482.51) 1860,482.51 1860,402.49 ccw(c1866,402.49) 1861.74,398.26 P15.2
IN2P: P13.2 P16.2 U6.8 | length 614.5
  Top Layer w6: U6.8 1514.53,704.53 1595,785 1725,785 P16.2
IN3P: P14.2 U6.10 | length 1366.6
  Top Layer w6: U6.10 1475.16,1320.16 1790,1635 P14.2
IN4P: P17.2 U6.12 | length 1732.9
  Top Layer w6: U6.12 1435.79,554.21 1410,580 1410,970 1435,995 1435,1552.51 1435.79,1553.3 cw(c1441.79,1553.3) 1437.54,1557.54 P17.2
INT: U1.3 U2.39 | length 622.3
  Top Layer w6: U1.3 -445,1445 -390,1390 -97.49,1390 cw(c-97.49,1384) -93.27,1388.27 -15.95,1310.95 cw(c-20.21,1306.73) -14.21,1306.73 U2.39
IR_SLEEP: Q1.1 U2.16 | length 1472.3
  Top Layer w6: U2.16 830,685 v1@955,810 ; v1(850,1820) 850.16,1820.16 850.16,1859.25 Q1.1
  Bottom Layer w6: v1(850,1820) 850,1535.12 837.98,1523.1 837.98,1237.02 954.48,1120.52 v1(954.48,812.26)
IR_SLEEP_GND: J1.4 Q1.3 | length 559.9
  Top Layer w6: Q1.3 1105.59,1910.59 1301.18,2106.18 J1.4
LRCLK: U2.24 U6.23 | length 1535.5
  Top Layer w6: U2.24 720,1085 1023.24,781.76 cw(c1019,777.51) 1025,777.51 1025,427.49 ccw(c1031,427.49) 1026.74,423.26 1190,260 1490,260 1514.53,284.53 U6.23
MIC_BIAS: C18.2 U6.5 | length 91.6
  Top Layer w6: U6.5 1605.47,484.53 1620,470 C18.2
MISO/DAT0: P7.7 R13.1 U2.13 | length 1696.7
  Top Layer w10: v1@318.19,-633.19 P7.7 ; U2.13 535.01,541.14 ccw(c545,540.87) 535,540.87 v1(535,490) 535,449.41 R13.1
  Bottom Layer w10: 302.07,207.07 197.93,102.93 ccw(c205,95.86) 195,95.86 195,-295.86 ccw(c205,-295.86) 197.93,-302.93 319.48,-424.48 v1(319.48,-632.74) ; 302.1,207.1 ccw(c294.96,214.1) 304.96,213.89 310.99,497.76 cw(c334.48,497.26) 326.57,519.39 452.49,564.42 cw(c455.86,555) 462.91,562.09 ; 462.93,562.07 v1(535,490)
MOSI/CMD: P7.3 R12.1 U2.11 | length 1469.1
  Top Layer w6: R12.1 v1(435,485)
  Top Layer w10: v1(435,485) 435,540.98 U2.11 ; v1@491.42,-628.58 P7.3
  Bottom Layer w10: v1(435,485) 435,180 272.93,17.93 ccw(c280,10.86) 270,10.86 270,-105.86 ccw(c280,-105.86) 272.93,-112.93 489.48,-329.48 v1(489.48,-632.74)
NetC5_2: C5.2 U3.4 | length 68.2
  Top Layer w6: U3.4 907.6,-87.01 C5.2
NetC12_2: C12.2 C14.2 U6.2 | length 285.1
  Top Layer w6: U6.2 1589.53,425.47 1634.41,380.59 1755,380.59 1824.09,380.59 C12.2@1825,381.5
NetC16_1: C16.1 U5.4 | length 68.2
  Top Layer w10: U5.4 1793.7,83.7 1793.7,148.27 C16.1
NetC17_2: C17.2 U6.3 | length 91.9
  Top Layer w6: U6.3 1599.84,445.16 1615,430 C17.2
NetC21_2: C21.2 C22.2 U6.24 | length 217.1
  Top Layer w6: U6.24 1534.21,226.38 C22.2 1535.59,165.91 C21.2
NetC25_2: C25.2 U7.5 | length 87.7
  Top Layer w6: U7.5 429.68,1574.68 455.59,1600.59 C25.2
NetD1_A: D1.A R1.1 | length 92.4
  Top Layer w6: R1.1 D1.A
NetD2_A: D2.A R2.1 | length 91.9
  Top Layer w6: R2.1 D2.A
NetP3_P1: P3.P1 P3.P2
NetP8_2: P8.2 R14.1 | length 147.9
  Top Layer w6: R14.1 -350.59,-509.56 -326.03,-485 P8.2
NetP9_2: P9.2 R15.1 | length 389.8
  Top Layer w6: R15.1 1305.47,-165 1294.69,-175.78 1294.69,-179.72 1255,-219.41 1255,-400 1310,-455 P9.2
NetP10_2: P10.2 R16.1 | length 523.9
  Top Layer w6: P10.2 885,-510 1100,-295 1100,-219.41 1139.69,-179.72 1139.69,-175.78 1150.47,-165 R16.1
NetP11_2: P11.2 R17.1 | length 290.6
  Top Layer w6: R17.1@1730,-240 1730,-360 1791.73,-421.73 P11.2
NetR20_2: R20.2 U6.21 | length 66.2
  Top Layer w6: R20.2@1475.16,315 U6.21
NetR21_1: R21.1 U7.2 U7.3 | length 150.6
  Top Layer w6: U7.2 481.65,1501.65 486.34,1506.34 486.34,1521.34 ; U7.3 486.34,1521.34 ; R21.1 510.59,1555.59 500,1545 500,1535 486.34,1521.34
PPS: P3.5 P13.1 | length 4399.2
  Top Layer w10: v1(-565.52,897.26) -561.46,897.26 -554.19,890 P3.5
  Bottom Layer w10: v1@-565,900 -594,929 -594,2066 -465,2195 865,2195 1067.07,1992.93 ccw(c1074.11,2000.03) 1068.58,1991.7 1372.51,1788.7 cw(c1350,1755) 1387.77,1769.69 1720.47,914.53 P13.1
RED: R2.2 U2.19 | length 2634.5
  Top Layer w6: R2.2 -510.52,-84.93 v1(-510.52,-37.74) ; U2.19 v1@705,835
  Bottom Layer w6: v1@-510,-40 -450,-40 -370,40 -370,890 -461.24,981.24 -461.24,1005.25 -457.72,1008.76 -335.96,1008.76 -330.19,1003 -203,1003 88.24,711.76 ccw(c92.49,716) 92.49,710 579.73,710 ccw(c579.73,716) 583.98,711.76 v1(704.48,832.26)
RESVD1: U2.28
RESVD2: U2.29
RESVD3: U2.30
RX_GPS: P3.4 U2.6 | length 865
  Top Layer w6: P3.4 -129.21,939.21 185.79,624.21 U2.6
RX_IRIDIUM: J1.10 U2.18 | length 2130.2
  Top Layer w6: U2.18 815,785 v1@895,865 ; v1@1125,1450 1185,1450 1596.46,1861.46 J1.10
  Bottom Layer w6: v1(894.48,867.26) 894.48,840.52 897.98,837.02 897.98,802.02 942.51,757.49 947.49,757.49 1005,815 1005,1332.78 v1(1124.48,1452.26)
RXD0: P1.4 U2.36 | length 875.3
  Top Layer w6: U2.36 135.79,1398.82 187,1450.03 187,1687 425,1925 P1.4
SCK: P7.5 R11.1 U2.12 | length 1361.1
  Top Layer w10: P7.5 404.8,-120.2 v1@420,-105 ; R11.1@485,390 485,540.98 U2.12
  Bottom Layer w10: v1(419.48,-107.74) 337.74,-107.74 300,-70 300,15 484.48,199.48 v1(484.48,442.26)
SCL: J2.2 P4.3 R4.2 U1.16 U2.35 U6.17 U7.1 | length 6898.7
  Top Layer w6: U1.16 v1@-545,2005 ; U2.35 184.48,1255.79 184.48,1312.26 188.79,1316.57 ccw(c184.55,1320.81) 189.06,1316.85 v1@205,1335 ; v1(206.5,1335) 207.97,1335.95 ccw(c204.73,1340.99) 208.95,1336.73 257.47,1385.25 cw(c261.71,1381) 261.71,1387 490,1387 ; U7.1 452.32,1481.97 490,1444.29 490,1387 ; R4.2 P4.3 980,1485 652.5,1485 554.5,1387 490,1387 ; v1@1350,450 1374.53,425.47 U6.17
  Top Layer w10: v1(939.48,572.26) 939.48,617.26 v1(999.48,677.26) ; v1@2295,-330 2407.72,-330 J2.2
  Bottom Layer w6: v1(-545.52,2002.26) -545.52,1880.52 -440,1775 35,1775 181.15,1628.85 cw(c176.91,1624.6) 182.71,1626.15 cw(c176.92,1624.56) 182.9,1625.04 ; 182.91,1625.01 205,1335 710,1335 828.24,1216.76 cw(c824,1212.51) 830,1212.51 830,847.49 ccw(c836,847.49) 831.76,843.24 998.61,676.39 1128.81,546.19 ; 1128.83,546.17 ccw(c1356.34,774.8) v1(1354.48,452.26)
  Bottom Layer w10: v1@940,575 940,120 1392.74,-332.74 v1(2289.48,-332.74)
SD_EN: U2.22 U3.3 | length 1125.8
  Top Layer w6: U2.22 v1@710,985 ; v1@852.24,72.24 U3.3
  Bottom Layer w6: v1(704.48,982.26) 747.74,982.26 760,970 760,785 849.48,695.52 v1(849.48,72.26)
SDA: J2.3 P4.4 R3.2 U1.15 U2.34 U6.18 U7.4 | length 7348.3
  Top Layer w6: U1.15 v1@-495,1995 ; U2.34 234.48,1255.79 v1(234.48,1312.26) 290.46,1368.24 cw(c294.71,1364) 294.71,1370 587.51,1370 ccw(c587.51,1376) 591.76,1371.76 687.5,1467.5 1050.01,1467.5 ccw(c1050.01,1473.5) 1054.24,1469.24 1335.14,1750.14 cw(c1339.36,1745.88) 1339.36,1751.88 1346.88,1751.88 P4.4 R3.2 ; U7.4 452.32,1541.02 490,1578.7 v1@490,1585 ; v1(1263.22,430.76) 1286.45,441.22 ; 1286.49,441.23 1293.82,444.48 cw(c1296.27,439) 1296.27,445 1320,445 1359.21,405.79 U6.18
  Top Layer w10: v1(894.48,597.26) 894.48,627.26 v1(949.48,682.26) ; v1@2300,-380 2300.39,-379.61 J2.3
  Bottom Layer w6: v1(-495.52,1997.26) -498.76,2000.51 -498.76,2018.76 -515,2035 -560,2035 -580,2015 -580,1850 -145,1415 150,1415 183.24,1381.76 cw(c179,1377.51) 185,1377.51 185,1322.49 ccw(c191,1322.49) 186.74,1318.26 195,1310 235,1310 685,1310 810,1185 810,822.44 ccw(c816,822.49) 811.72,818.28 948.61,681.39 1178.19,451.81 ccw(c1182.4,456.08) 1180.98,450.25 v1(1263.22,430.76) ; v1@490,1585 604.48,1470.52 v1(604.48,1382.26)
  Bottom Layer w10: v1@895,595 895,20 1297.74,-382.74 v1(2294.48,-382.74)
  other v1: 489.48,1587.26
SHDNZ: U2.23 U6.14 | length 1301
  Top Layer w6: U2.23 637.74,1032.26 v1(689.48,1032.26) ; v1@1324.48,484.53 U6.14
  Bottom Layer w6: v1@690,1035 750,1035 780,1005 780,812.49 ccw(c786,812.49) 781.74,808.26 1163.2,426.8 ccw(c1167.42,431.07) 1166.4,425.16 ; 1166.43,425.15 1259.67,409.56 ccw(c1263.22,430.76) 1265.55,409.39 1363.15,420.03 ccw(c1362.51,426) 1366.76,421.76 1375.98,430.98 1375.98,477.77 1371.49,482.26 v1(1324.48,482.26)
TX_GPS: P3.3 U2.5 | length 930.8
  Top Layer w6: P3.3 -488.84,987.26 v1(-435.52,987.26) ; v1@135.79,519.21 U2.5
  Bottom Layer w6: v1@-430,990 -220,990 134.48,635.52 v1(134.48,517.26)
TX_IRIDIUM: J1.5 U2.17 | length 2073.7
  Top Layer w6: U2.17 820,735 v1@920,835 ; v1(980,1380) 1021.81,1380 1231.13,1589.32 1299.32,1589.32 1435,1725 1435,1955 1352.17,2037.83 cw(c1356.39,2042.09) 1350.39,2042.09 J1.5
  Bottom Layer w6: v1(919.48,837.26) 919.48,805.52 945,780 953.03,780 975.98,802.95 975.98,1355.5 cw(c981.98,1355.5) 976.07,1356.49 v1(980,1380)
TXD0: P1.5 U2.37 | length 1112.9
  Top Layer w6: U2.37 85.79,1365.79 175,1455 175,1765 375,1965 375,2062.55 cw(c381,2062.51) 376.73,2066.73 453.26,2143.26 cw(c457.49,2139) 457.49,2145 P1.5
UP: P10.1 U2.33 | length 8093.7
  Top Layer w6: U2.33 285.79,1346.6 292.19,1353 1143,1353 1790,2000 1790,2190 1860,2260 2610,2260 2670,2200 2670,-646.49 2666.49,-650 820,-650 755,-585 755,-340 762.17,-332.83 P10.1
VCC_SD: C4.1 P7.4 U3.5 | length 1080.6
  Top Layer w20: P7.4 448.11,-471.89 581.56,-338.44 651.56,-338.44 785,-205 990,-205 1045,-150 1045,-33.96 1033.28,-22.24 U3.5 983.7,-23.54 983.7,-98.11 C4.1
VIN: C3.1 C6.2 C7.1 C9.1 C11.1 J1.2 P1.3 P3.1 P5.3 R8.2 U3.1 U4.1 U4.4 U5.1 | length 7224.6
  Top Layer w6: U4.4 U4.4@265,326.89 ; C9.1 U4.4@265,326.89 ; 305,135 305,320 298.11,326.89 U4.4@265,326.89
  Top Layer w10: P3.1 -558.15,1086.85 -595,1050 ; U4.1 145,205.32 136.61,213.7 96.3,213.7 -20,330 -20,410 -40,430 -410,430 -595,615 -595,1050 ; P1.3 325,2205 305,2225 ; 484.1,2245 ccw(c484.14,2235) 477.09,2242.09 462.91,2227.91 cw(c455.86,2235) 455.86,2225 305,2225 ; 484.14,2245 1165.86,2245 cw(c1165.86,2235) 1172.89,2242.11 1202.09,2212.91 cw(c1195,2205.86) 1205,2205.9 ; 515,85 515,190 545,220 R8.2 ; P5.3 572.5,-22.5 572.5,76.91 C7.1 575.91,78.5 C6.2 ; J1.2 1205,2156.14 1205,2205.86 ; C11.1 1716.3,-77.95 1716.3,-13.39 U5.1 ; -595,1050 -595,2070 -530,2135 -230,2135 -140,2225 305,2225
  Top Layer w20: U4.1 145,155 165,135 305,135 465,135 515,85 515,30 P5.3 675,-25 844.41,144.41 C3.1 ; U3.1 983.7,73.54 983.7,143.11 C3.1 ; U5.1@1716.3,-13.39 1468.39,-13.39 1310.59,144.41 C3.1
VSENS: R8.1 R9.2 U2.21 | length 873
  Top Layer w6: U2.21 v1@705,935 ; R8.1 635.59,277.41 638,275 v1(680,275)
  Bottom Layer w6: v1(680,275) 737.98,332.98 737.98,903.76 v1(704.48,937.26)
pads on no net: J1.3 J1.6 J1.7 J1.8 J1.9 J1.S1 J1.S2 J2.S1 J2.S2 P1.2 P5.1 P7.0 P8.3 P8.4 P9.3 P9.4 P10.3 P10.4 P11.3 P11.4 U1.1 U1.4 U1.5 U1.6 U1.7 U1.8 U1.9 U1.10 U1.11 U1.12 U4.3 U6.20 U7.7 U7.11 U7.12
copper on no net: | length 90
  Top Layer w10: 1955,-90 1955,0

## Polygon pours and split planes (outlines as drawn)
AGND on Layer 1 (split plane): 2904.9,-139.9 2097.11,-139.9 2003.6,-46.4 2001.95,-45.29 2000,-44.9 1232.11,-44.9 1180.1,7.11 1180.1,837.89 1372.11,1029.9 1970,1029.9 1971.95,1030.29 1973.6,1031.4 2028.6,1086.4 2029.71,1088.05 2030.1,1090 2030.1,1375 2029.71,1376.95 2028.6,1378.6 2008.6,1398.6 2006.95,1399.71 2005,1400.1 1827.11,1400.1 1800.1,1427.11 1800.1,2279.9 2904.9,2279.9
DGND on Layer 1 (split plane): 1789.9,1425 1790.29,1423.05 1791.4,1421.4 1821.4,1391.4 1823.05,1390.29 1825,1389.9 2002.89,1389.9 2019.9,1372.89 2019.9,1092.11 1967.89,1040.1 1370,1040.1 1368.05,1039.71 1366.4,1038.6 1171.4,843.6 1170.29,841.95 1169.9,840 1169.9,5 1170.29,3.05 1171.4,1.4 1226.4,-53.6 1228.05,-54.71 1230,-55.1 1997.89,-55.1 2091.4,-148.6 2093.05,-149.71 2095,-150.1 2904.9,-150.1 2904.9,-679.9 -604.9,-679.9 -604.9,2279.9 1789.9,2279.9
AVDD on Layer 2 (split plane): 2904.9,-139.9 2097.11,-139.9 2003.6,-46.4 2001.95,-45.29 2000,-44.9 1232.11,-44.9 1180.1,7.11 1180.1,837.89 1367.11,1024.9 1965,1024.9 1966.95,1025.29 1968.6,1026.4 2028.6,1086.4 2029.71,1088.05 2030.1,1090 2030.1,1375 2029.71,1376.95 2028.6,1378.6 2003.6,1403.6 2001.95,1404.71 2000,1405.1 1827.11,1405.1 1800.1,1432.11 1800.1,2279.9 2904.9,2279.9
3V3 on Layer 2 (split plane): 1789.9,1430 1790.29,1428.05 1791.4,1426.4 1821.4,1396.4 1823.05,1395.29 1825,1394.9 1997.89,1394.9 2019.9,1372.89 2019.9,1092.11 1962.89,1035.1 1365,1035.1 1363.05,1034.71 1361.4,1033.6 1171.4,843.6 1170.29,841.95 1169.9,840 1169.9,5 1170.29,3.05 1171.4,1.4 1226.4,-53.6 1228.05,-54.71 1230,-55.1 1997.89,-55.1 2091.4,-148.6 2093.05,-149.71 2095,-150.1 2904.9,-150.1 2904.9,-679.9 -604.9,-679.9 -604.9,2279.9 1789.9,2279.9

## Other copper
Layer 1 (plane layer: these items are gaps in the copper):
  lines w10: 1795,2300 1795,1425 1825,1395 2005,1395 2025,1375 2025,1090 1970,1035 1370,1035 1175,840 1175,5 1230,-50 2000,-50 2095,-145 2925,-145
Layer 2 (plane layer: these items are gaps in the copper):
  lines w10: 1795,2300 1795,1430 1825,1400 2000,1400 2025,1375 2025,1090 1965,1030 1365,1030 1175,840 1175,5 1230,-50 2000,-50 2095,-145 2920,-145

## Silkscreen, mask and mechanical layers (free items; w line width, h text height)
Top Overlay:
  text "Iridium" at 1320,2235.61 h60
  text "Medusa" at -105,2223.8 h118.11 r180
  text "+" at 2517.14,2090 h80
  text "S" at 2550,1997.54 h80 r90
  text "CH4" at 2464.33,1955 h60 r90
  text "-" at 2566.28,1905 h80 r90
  text "+" at 2517.14,1690 h80
  text "S" at 2550,1597.54 h80 r90
  text "CH3" at 2464.33,1570 h60 r90
  text "-" at 2545,1505 h80 r90
  text "+" at 2517.14,1215 h80
  text "-" at 2555,1135 h80 r90
  text "POW" at 2464.33,1130 h60 r90
  text "+" at 2517.14,850 h80
  text "PPS" at 1639.33,810 h60 r90
  text "S" at 2550,757.54 h80 r90
  text "CH2" at 2464.33,715 h60 r90
  text "-" at 2545,665 h80 r90
  text "+" at 2442.14,410 h80
  text "-" at 0,370 h80 r270
  text "POW" at 50.67,370 h60 r270
  text "S" at 2475,317.54 h80 r90
  text "CH1" at 2584.33,295 h60 r90
  text "+" at 37.86,290 h80 r180
  text "-" at 2470,225 h80 r90
  text "ON" at 715,-44.33 h60
  text "Stop" at -235,-664.01 h118.11
  text "ENTER" at 1805,-685 h118.11
  text "UP" at 935,-688.69 h118.11
  text "DN" at 1425,-690 h118.11
Mechanical 1:
  the board outline again, w10

## Text inside footprints (layer, text, board x,y; h text height)
C6: Top Overlay "+" at 650,55 h19.68 r270
C12: Top Overlay "+" at 1830,355 h19.68 r270
C13: Top Overlay "+" at 1315,320 h19.68 r270
C19: Top Overlay "+" at 1670,335 h19.68 r90
C21: Top Overlay "+" at 1560,180 h19.68
C23: Top Overlay "+" at 265,1475 h19.68 r270